# Altium PCB project_buran_a01.PcbDoc
Units mm, origin at the board's own origin, x right, y up, seen from the top; angles counter-clockwise.
Board outline 100 x 50 mm, 2 copper layers (Top Layer, Bottom Layer); 28 components, 33 nets, 138 pads, 184 vias.
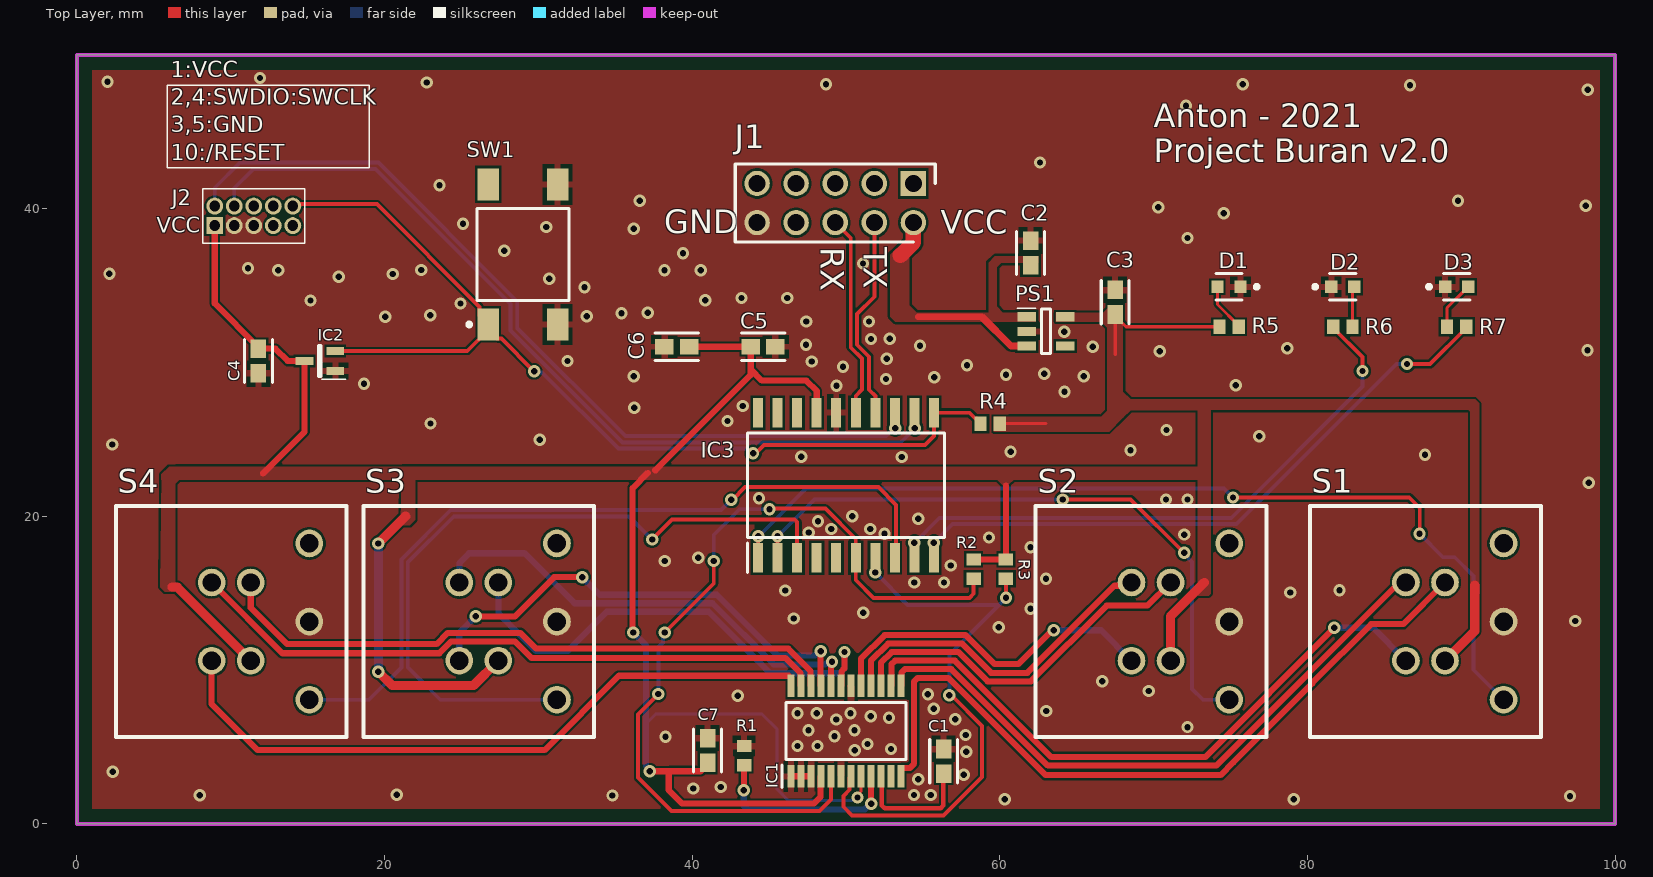
[diagram p0: Top Layer view]
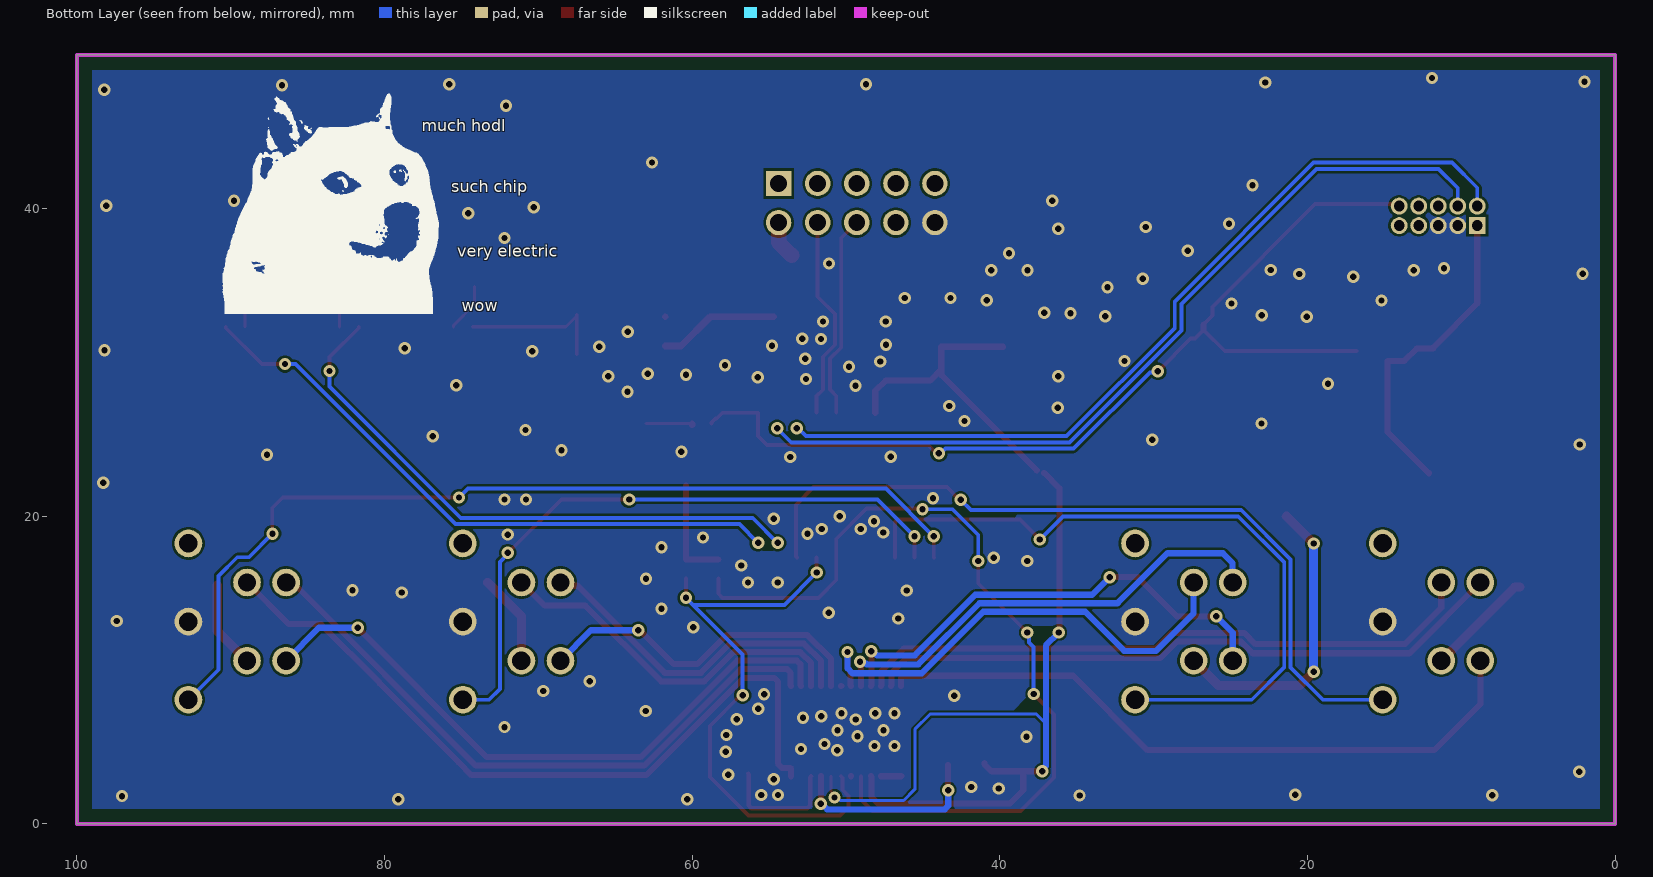
[diagram p1: Bottom Layer view, seen from below]
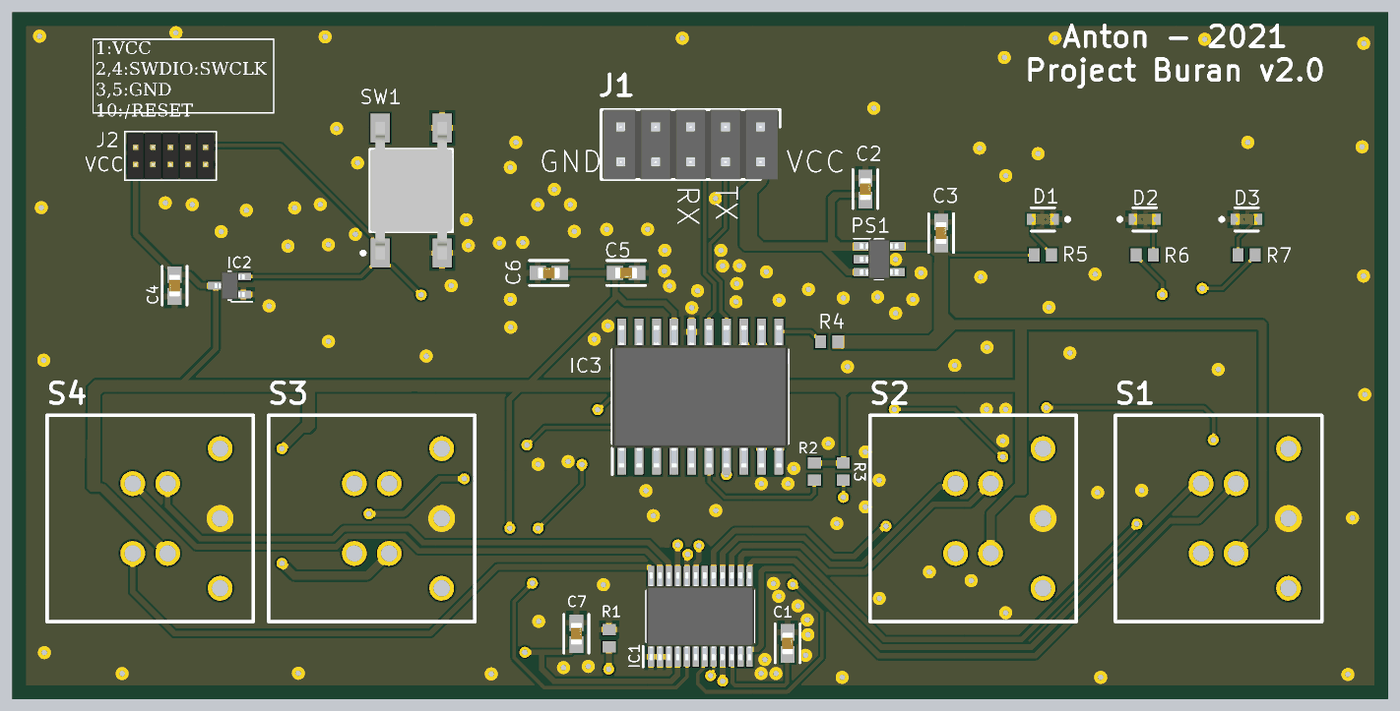
[diagram p2: 3D render of the assembled board from above, using the file's embedded part models]

## Layer stack, top to bottom
Top Solder: solder mask 0.0102, Solder Resist, Dk 3.5
Top Layer: signal copper 0.0356
Dielectric 1: dielectric 0.32, FR-4, Dk 4.8
Bottom Layer: signal copper 0.0356
Bottom Solder: solder mask 0.0102, Solder Resist, Dk 3.5

## Board outline
0,0 100,0 100,50 0,50

## Design rules (kind name [scope] priority, off if disabled: settings)
BoardOutlineClearance [All] p1: gap=0.381 ignorepadtopadclearanceinfootprint=FALSE
Clearance [All] p1: gap=0.152 ignorepadtopadclearanceinfootprint=FALSE except(0: Arc-Hole Track-Hole SMDPad-Hole THPad-Hole Via-Hole Fill-Hole Poly-Hole Region-Hole Text-Hole)
ComponentClearance [All] p1: gap=0.025 collisioncheckmode=3 verticalgap=0.025 showdistances=FALSE
DiffPairsRouting [All] p1: maxlimit=10 minlimit=0.152 mostfreqgap=0.203 toplayer_minwidth=0.152 toplayer_maxwidth=0.381 toplayer_prefwidth=0.203 bottomlayer_minwidth=0.152 bottomlayer_maxwidth=0.381 bottomlayer_prefwidth=0.203 maxuncoupledlength=12.7
HoleSize [All] p1: absolutevalues=TRUE maxlimit=6.731 minlimit=0.33 maxpercent=80.000 minpercent=20.000
HoleToHoleClearance [All] p1: gap=0.254 allowstackedmicrovias=FALSE
MinimumAnnularRing [All] p1: minimumring=0.178
MinimumSolderMaskSliver [All] p1: minsoldermaskwidth=0
PlaneClearance [All] p1: clearance=0.254
PlaneConnect [InNet('GND')] p1: planeconnectstyle=Relief reliefexpansion=0.406 reliefentries=4 reliefconductorwidth=0.152 reliefairgap=0.152
PolygonConnect PolygonConnect_RELIEF [(InComponent('C1') OR InComponent('C2') OR InComponent('C3') OR InComponent('C4') OR InComponent('C5') OR InComponent('C6') OR InComponent('C7') OR InComponent('D1') OR InComponent('D2') OR InComponent('D3') OR InComponent('IC1') OR InComponent('IC2') OR InComponent('IC3') OR InComponent('PS1') OR InComponent('R1') OR InComponent('SW1') OR InComponent('J1')) vs InNet('GND')] p1: thpad.connectstyle=Direct thpad.reliefconductorwidth=0.254 thpad.reliefentries=4 thpad.polygonreliefangle="90 Angle" thpad.airgapwidth=0.254 smdpad.connectstyle=Relief smdpad.reliefconductorwidth=0.42 smdpad.reliefentries=4 smdpad.polygonreliefangle="90 Angle" smdpad.airgapwidth=0.254 via.connectstyle=Direct via.reliefconductorwidth=0.254 via.reliefentries=4 via.polygonreliefangle="90 Angle" via.airgapwidth=0.254
PolygonConnect [All] p2: connectstyle=Direct reliefconductorwidth=0.203 reliefentries=4 polygonreliefangle="90 Angle" airgapwidth=0.152
RoutingCorners [All] p1: cornerstyle=45-Degree minsetback=1.25 maxsetback=1.25
RoutingVias [All] p1: holewidth=0.381 width=0.762 viastyle="Through Hole" minholewidth=0.33 minwidth=0.686 maxholewidth=2.54 maxwidth=2.896
SilkToSilkClearance [All] p1: silktosilkclearance=0
SilkToSolderMaskClearance [IsPad] p1: minsilkscreentomaskgap=0.152 clearancetoexposedcopper=TRUE
SolderMaskExpansion [All] p1: expansion=0.075 istentingtop=FALSE
Width [All] p1: maxlimit=10.16 minlimit=0.152 preferedwidth=0.203
20 further rules are at their usual default settings.

## Components (designator, comment, footprint, x,y, rotation, side; value= is the part's Value field where it differs from the comment)
C1 "1uF" FP-GRM188-0_1-e0_2_0_55-IPC_A 56.35,4.075 r90 top
C2 "1uF" FP-GRM188-0_1-e0_2_0_55-IPC_A 62,37.125 r90 top
C3 "1uF" FP-GRM188-0_1-e0_2_0_55-IPC_A 67.5,33.925 r90 top
C4 "100nF" FP-GRM188-0_1-e0_2_0_55-IPC_A 11.8,30.1 r270 top
C5 "100nF" FP-GRM188-0_1-e0_2_0_55-IPC_A 44.61,31.025 r0 top
C6 "4.7uF" FP-GRM188-0_1-e0_2_0_55-IPC_A 38.998,31.025 r180 top
C7 "1uF" FP-GRM188-0_1-e0_2_0_55-IPC_A 41,4.775 r90 top
D1 "POWER LED" FP-LTST-C190GKT-MFG 74.9,34.925 r180 top
D2 "LED 1" FP-LTST-C190GKT-MFG 82.3,34.925 r0 top
D3 "LED 2" FP-LTST-C190GKT-MFG 89.7,34.925 r0 top
IC1 "LP5012PWR" SOP65P640X120-24N 50,6.041 r90 top
IC2 "MAX803SQ308T1G" SOT65P220X100-3N 15.8,30.1 r180 top
IC3 "ATSAMD11D14A-SSUT" SOIC127P1032X265-20N 50,22.025 r90 top
J1 "2213S-10G" HDRV10W64P254_2X5_1270X508X854P 54.38,41.64 r180 top
J2 "M50-3500542" M503500542 8.96,38.9 r0 top
PS1 "TLV75733PDBVR" SOT95P280X145-5N 63,32.025 r0 top
R1 "2K4" RESC1609X50X30NL10T20 43.375,4.45 r270 top
R2 "4K7" RESC1609X50X30NL10T20 58.297,16.575 r90 top
R3 "4K7" RESC1609X50X30NL10T20 60.397,16.575 r90 top
R4 "10K" RESC1609X50X30NL10T20 59.375,26.025 r0 top
R5 "30R" RESC1609X50X30NL10T20 74.9,32.325 r180 top
R6 "30R" RESC1609X50X30NL10T20 82.3,32.325 r180 top
R7 "30R" RESC1609X50X30NL10T20 89.7,32.325 r0 top
S1 "PB26-13M-B-WT-RGB-N" "RGB Switch" 80.17,5.66 r0 top
S2 "PB26-13M-B-WT-RGB-N" "RGB Switch" 62.33,5.66 r0 top
S3 "PB26-13M-B-WT-RGB-N" "RGB Switch" 18.63,5.66 r0 top
S4 "PB26-13M-B-WT-RGB-N" "RGB Switch" 2.53,5.66 r0 top
SW1 "FSM4JSMA" TECO-FSM4JSMA_V 29,37.025 r180 top

## Footprints (in the part's own frame and the unit in brackets; to place one, negate y for a bottom-side part, rotate by r counter-clockwise, add the part's x,y. Pads: shape width x height; smd on the part's side, far side on the other; paste and mask are expansions set on the pad)
FP-GRM188-0_1-e0_2_0_55-IPC_A [mm]
  rect 1.208x1.012 smd paste+0 mask+0: 1(-0.802,0) 2(0.802,0)
  silkscreen extent -1.41,-0.91 1.41,0.91, body extent -1.91,-1.01 1.91,1.01, height 0.25
FP-LTST-C190GKT-MFG [mm]
  rect 0.8x0.8 smd paste+0 mask+0: 1(-0.75,0) 2(0.75,0)
  silkscreen extent -1.92,-0.85 0.85,0.85, body extent -1.25,-0.55 1.25,0.55, height 0.25
HDRV10W64P254_2X5_1270X508X854P [mm]
  rect 1.65x1.65 hole 1.1: 1(0,0)
  round 1.65 hole 1.1: 2(0,2.54) 3(2.54,0) 4(2.54,2.54) 5(5.08,0) 6(5.08,2.54) 7(7.62,0) 8(7.62,2.54) 9(10.16,0) 10(10.16,2.54)
  silkscreen extent -1.42,-1.27 11.58,3.81, body extent -1.27,-1.27 11.43,3.81, height 8.54
M503500542 [mm]
  rect 1.1x1.1 hole 0.7: 1(0,0)
  round 1.1 hole 0.7: 2(0,1.27) 3(1.27,0) 4(1.27,1.27) 5(2.54,0) 6(2.54,1.27) 7(3.81,0) 8(3.81,1.27) 9(5.08,0) 10(5.08,1.27)
  silkscreen extent -0.78,-1.14 5.86,2.41, body extent -0.63,-1.06 5.72,2.34, height 3.95
RESC1609X50X30NL10T20 [mm] "Chip Resistor, 2-Leads, Body 1.55x0.85mm, IPC Medium Density"
  rect 0.8x0.95 smd: 1(-0.625,0) 2(0.625,0)
  body extent -0.82,-0.48 0.82,0.48, height 0.5
"RGB Switch" [mm]
  round 1.8 hole 1.2: COM(12.58,2.42) L1-(8.77,10.04) L2+(8.77,4.96) L3-(6.23,4.96) L4-(6.23,10.04) NC(12.58,12.58) NO(12.58,7.5)
  silkscreen extent 0,0 15,15
SOIC127P1032X265-20N [mm]
  rect 1.925x0.65 smd: 1(-4.712,5.715) 2(-4.712,4.445) 3(-4.712,3.175) 4(-4.712,1.905) 5(-4.712,0.635) 6(-4.712,-0.635) 7(-4.712,-1.905) 8(-4.712,-3.175) 9(-4.712,-4.445) 10(-4.712,-5.715) 11(4.712,-5.715) 12(4.712,-4.445) 13(4.712,-3.175) 14(4.712,-1.905) 15(4.712,-0.635) 16(4.712,0.635) 17(4.712,1.905) 18(4.712,3.175) 19(4.712,4.445) 20(4.712,5.715)
  silkscreen extent -5.68,-6.4 3.4,6.4, body extent -5.16,-6.4 5.16,6.4, height 2.65
SOP65P640X120-24N [mm]
  rect 1.475x0.45 smd: 1(-2.938,3.575) 2(-2.938,2.925) 3(-2.938,2.275) 4(-2.938,1.625) 5(-2.938,0.975) 6(-2.938,0.325) 7(-2.938,-0.325) 8(-2.938,-0.975) 9(-2.938,-1.625) 10(-2.938,-2.275) 11(-2.938,-2.925) 12(-2.938,-3.575) 13(2.938,-3.575) 14(2.938,-2.925) 15(2.938,-2.275) 16(2.938,-1.625) 17(2.938,-0.975) 18(2.938,-0.325) 19(2.938,0.325) 20(2.938,0.975) 21(2.938,1.625) 22(2.938,2.275) 23(2.938,2.925) 24(2.938,3.575)
  silkscreen extent -3.67,-3.9 1.85,4.15, body extent -3.2,-3.9 3.2,3.9, height 1.2
SOT65P220X100-3N [mm]
  rect 1.15x0.55 smd: 1(-1,0.65) 2(-1,-0.65) 3(1,0)
  silkscreen extent -1.67,-1 0.08,1.17, body extent -1.1,-1 1.1,1, height 1
SOT95P280X145-5N [mm]
  rect 1.2x0.6 smd: 1(-1.25,0.95) 2(-1.25,0) 3(-1.25,-0.95) 4(1.25,-0.95) 5(1.25,0.95)
  silkscreen extent -1.85,-1.45 0.3,1.5, body extent -1.4,-1.45 1.4,1.45, height 1.45
TECO-FSM4JSMA_V [mm] "SMD, 4-Leads, Body 6x6mm, Pitch 4.5mm"
  rect 1.4x2.1 smd: 1(2.25,4.55) 2(2.25,-4.55) 3(-2.25,4.55) 4(-2.25,-4.55)
  silkscreen extent -3,-3 3.62,4.67, body extent -3,-5 3,5, height 5.08

## Part data
C1 C2 C3 C4 C5 C6 C7: library part CMP-2006-02792-2, "Chip Multilayer Ceramic Capacitors for General Purpose, 0603, 10uF, X5R, 15%, 20%, 6.3V", Capacitance=10uF, Case Code (Imperial)=0603, Case Code (Metric)=1608, Dielectric=X5R, Max Operating Temperature=85°C, Min Operating Temperature=-55°C, Package Quantity=4000, Tolerance=20%, Voltage=6.3V, Case/Package=0603, Depth=0.8mm, Height=0.8mm, Lead Free="Lead Free", Length=1.6mm, Material=Ceramic, Mount="Surface Mount", Packaging="Tape and Reel", Radiation Hardening=No, REACH SVHC="No SVHC", Termination=SMD/SMT, Thickness=0.035inch, Voltage Rating=6.3V, Voltage Rating (DC)=6.3V, Width=0.031inch
D1 D2 D3: library part CMP-22017-000005-2, "LED GREEN CLEAR CHIP SMD", Case Code (Imperial)=0603, Case Code (Metric)=1608, Color=Green, Forward Current=30mA, Forward Voltage=2.1V, Lens Color=Colorless, Max Operating Temperature=85°C, Min Operating Temperature=-55°C, Package Quantity=1, Power Dissipation=100mW, Reverse Voltage=5V, Test Current=10mA, Voltage=2V, Case/Package=0603, Depth=0.8mm, Dominant Wavelength=569nm, Height=0.8mm, Illumination Color=Green, Lead Free="Lead Free", Length=1.6mm, Lens Style=Clear, Lens Transparency=Clear, Luminous Intensity=6mcd, Mount="Surface Mount", Number of Elements=1, Number of LEDs=1, Number of Pins=2, Packaging="Tape and Reel", Power Rating=100mW, Radiation Hardening=No, Viewing Angle=130°, Wavelength=565nm, Width=0.8mm
IC1: "Integrated Circuit", Manufacturer_Name="Texas Instruments", Mouser Part Number=595-LP5012PWR, Datasheet Link=https://www.ti.com/lit/ds/symlink/lp5012.pdf?ts=1615929314042&ref_url=https%253A%252F%252Fwww.mouser.co.uk%252F, Height=1.2mm, Manufacturer_Part_Number=LP5012PWR, Mouser Price/Stock=https://www.mouser.co.uk/ProductDetail/Texas-Instruments/LP5012PWR/?qs=T94vaHKWudSL6jLwBy12Hg%3D%3D
IC2: "Integrated Circuit", Manufacturer_Name="ON Semiconductor", Mouser Part Number=863-MAX803SQ308T1G, Arrow Part Number=MAX803SQ308T1G, Arrow Price/Stock=https://www.arrow.com/en/products/max803sq308t1g/on-semiconductor, Datasheet Link=http://www.onsemi.com/pub/Collateral/MAX803-D.PDF, Height=1mm, Manufacturer_Part_Number=MAX803SQ308T1G, Mouser Price/Stock=https://www.mouser.co.uk/ProductDetail/ON-Semiconductor/MAX803SQ308T1G?qs=aSUclzrs14xj4ys5ck7Tew%3D%3D
IC3: "Integrated Circuit", Manufacturer_Name=Microchip, Mouser Part Number=556-ATSAMD11D14ASSUT, Arrow Part Number=ATSAMD11D14A-SSUT, Arrow Price/Stock=https://www.arrow.com/en/products/atsamd11d14a-ssut/microchip-technology, Datasheet Link=http://ww1.microchip.com/downloads/en/devicedoc/atmel-42363-sam-d11_datasheet.pdf, Height=2.65mm, Manufacturer_Part_Number=ATSAMD11D14A-SSUT, Mouser Price/Stock=https://www.mouser.co.uk/ProductDetail/Microchip-Technology-Atmel/ATSAMD11D14A-SSUT/?qs=lrqjml%252Bjt8f8EFewxXrzCw%3D%3D
J1: "Connector", Manufacturer_Name=MULTICOMP, Datasheet Link=http://www.farnell.com/datasheets/1697536.pdf, Height=8.54mm, Manufacturer_Part_Number=2213S-10G
J2: "Connector", Manufacturer_Name=Harwin, Mouser Part Number=855-M50-3500542, Datasheet Link=http://docs-emea.rs-online.com/webdocs/13d4/0900766b813d4011.pdf, Height=4.15mm, Manufacturer_Part_Number=M50-3500542, Mouser Price/Stock=https://www.mouser.co.uk/ProductDetail/Harwin/M50-3500542?qs=9fQaSFfsqsyXI0P9tFOVoQ%3D%3D
PS1: "Power Supply", Manufacturer_Name="Texas Instruments", Mouser Part Number=595-TLV75733PDBVR, Arrow Part Number=TLV75733PDBVR, Arrow Price/Stock=https://www.arrow.com/en/products/tlv75733pdbvr/texas-instruments, Datasheet Link=http://www.ti.com/lit/gpn/tlv757p, Height=1.45mm, Manufacturer_Part_Number=TLV75733PDBVR, Mouser Price/Stock=https://www.mouser.co.uk/ProductDetail/Texas-Instruments/TLV75733PDBVR/?qs=y6ZabgHbY%252BwAAzSntTW34w%3D%3D
R1 R2 R3 R4 R5 R6 R7: library part CMP-2000-03854-1, Manufacturer="Vishay Dale", Part Number=CRCW0603110RFKEA
S1 S2 S3 S4: "WS-PBTL Illuminated THT Push Button Switch, Red & Green & Blue", Emitting Color="Red & Green & Blue", Operating Temperature="-40 to +85degC", Part Number=465M111172501, Rated Current=100mA, Rated Voltage=12VDC, ComponentLink1Description=Manufacturer, ComponentLink1URL=http://www.we-online.de, ComponentLink2Description=Datasheet, ComponentLink2URL=https://katalog.we-online.com/em/datasheet/465M111172501.pdf, Contact Material="Copper Alloy", Contact Plating=Gold, Mounting Technology=THT, Operation Force=200gf, Packaging="ESD Tray", Published Date="September 2019", Publisher="Wurth Elektronik", Size=15x15mm, Terminal Material="Copper Alloy", Terminal Plating=Tin
SW1: library part CMP-2000-05602-2, "Swicth, SPST, 24 V, -35 to 85 degC, 4-Pin SMD, RoHS, Tape and Reel", Case\/Package=SMD/SMT, Contact Current Rating=50mA, Contact Resistance=100mOhm, Manufacturer="TE Connectivity", Max Operating Temperature=85degC, Max Voltage Rating (DC)=12V, Min Operating Temperature=-35degC, Operating Force=1.57N, Package Description="4-Pin Surface Mount Device, Body 6 x 6 mm, Pitch 4.5 mm", Package Quantity=750, Voltage Rating=24V, Actuator Length=0.055inch, Actuator Material=Polyamide, Contact Material=CopperAlloy, Contact Plating=Silver, Current Rating=50mA, Datasheet URL=http://www.te.com/commerce/DocumentDelivery/DDEController?Action=showdoc&DocId=Customer+Drawing%7F2-1437565-7%7FV%7Fpdf%7FEnglish%7FENG_CD_2-1437565-7_V.pdf%7F4-1437565-2, Datasheet Version="Rev. V, 02/2015", Electrical Life=100000Cycles, Illumination Type=Illuminated, Length=6mm, Manufacturer URL=http://www.te.com/, Mechanical Life=100000Cycles, Mount=SurfaceMount, Mounting Technology=SurfaceMount, Orientation=Straight, Package Reference=FSM4JSMA, Packaging=LoosePiece, REACH SVHC=Unknown, RoHSCompliant=true, Switch Travel=0.25mm, Termination=GullWing, Throw Configuration=SPST, Voltage Rating (DC)=24V, Width=6mm

## Via types
v1: diameter 0.8, hole 0.411, Top Layer to Bottom Layer, 184 vias

## Nets (pads, with @x,y where several pads share a name; then routed paths per layer and width w, separated by ;. In a path a pad name is that pad's centre, name@x,y a point inside that pad or via, vN(x,y) a via of type N, cw(c..) or ccw(c..) an arc to the next point about the centre after c; other vN are vias at no path point)
/RESET: IC2.2 IC3.11 J2.10 R4.1 SW1.1 | length 64.7
  Top Layer w0.254: J2.10 14.17,40.3 19.5,40.3 26.177,33.623 26.177,33.048 SW1.1 ; IC2.2 25.375,30.75 SW1.1@26.75,32.125 ; SW1.1@26.888,31.988 27.323,31.552 27.598,31.552 v1(29.725,29.425) ; v1(43.96,24.096) 44.108,24.096 44.657,24.645 55.145,24.645 55.715,25.215 IC3.11 58.038,26.737 58.402,26.373 58.477,26.373 58.75,26.1 R4.1
  Top Layer w0.4: SW1.1@26.75,32.125 SW1.1
  Bottom Layer w0.254: v1(29.725,29.425) 29.798,29.352 30.248,29.352 35.2,24.4 43.538,24.4 43.843,24.096 v1(43.96,24.096)
GND: C1.2 C2.2 C3.2 C4.2 C5.2 C6.2 C7.2 D1.1 D2.1 D3.1 IC1.1 IC1.2 IC1.3 IC1.6 IC1.18 IC2.1 IC3.16 J1.10 J2.3 J2.5 PS1.2 R1.1 S1.NO S2.NO S3.NO S4.NO SW1.3 SW1.4 | length 1.5
  Top Layer w0.203: D2.1@81.488,34.987 D2.1
  Top Layer w0.4: IC1.1@46.4,3.128 IC1.1 IC1.2 ; IC1.2@47.062,3.115 IC1.2 ; IC1.3 IC1.2 ; IC1.18@50.313,8.967 IC1.18
  other v1: 60.314,1.6 79.1,1.6 97.065,1.814 34.814,1.85 7.989,1.875 54.425,1.886 55.5,1.881 20.8,1.9 40.062,2.311 41.863,2.401 54.7,2.9 57.65,3.206 2.339,3.4 57.825,4.706 50.562,4.799 52.925,4.877 46.85,5.075 48.15,5.075 51.4,5.2 38.262,5.676 49.25,5.7 57.775,5.781 47.562,6.099 50.55,6.1 72.2,6.3 49.362,6.799 57.1,6.8 52.8,6.9 51.6,7 46.85,7.2 48.1,7.2 50.289,7.199 63.014,7.35 55.7,7.5 42.962,8.34 55.325,8.431 69.691,8.641 66.65,9.275 59.922,12.8 97.4,13.2 46.595,13.365 51.13,13.739 62,14 78.88,15.05 46.05,15.181 82.08,15.2 54.442,15.694 56.372,15.694 63,15.95 56.8,16.8 38.217,17.1 40.4,17.3 62,18 59.3,18.625 71.991,18.814 52.5,18.875 47.575,18.95 49.04,19.175 51.58,19.175 48.178,19.684 54.698,19.845 50.4,20 70.8,21.1 72.2,21.1 44.347,21.174 98.289,22.175 53.629,23.859 47.088,23.865 87.639,24 60.7,24.2 68.5,24.3 2.289,24.675 30.089,24.975 76.864,25.2 70.84,25.617 22.985,26.04 42.3,26.2 36.233,27.069 43.289,27.175 64.2,28.1 49.387,28.49 75.339,28.525 18.664,28.625 52.6,28.925 55.728,29.043 36.2,29.1 65.447,29.1 60.4,29.2 62.889,29.275 49.8,29.725 57.864,29.825 47.77,30.07 31.9,30.1 52.65,30.25 70.389,30.725 98.2,30.8 78.693,30.935 66.039,31.025 54.809,31.1 47.401,31.157 51.625,31.531 52.839,31.55 64.195,32.006 47.425,32.667 51.5,32.667 20.038,32.978 33.148,33.015 22.975,33.075 35.4,33.2 37.105,33.242 24.937,33.836 15.185,34.028 40.85,34.05 43.204,34.19 46.177,34.2 33,34.9 30.7,35.45 17.02,35.582 2.114,35.775 20.527,35.76 13.083,35.996 38.196,36 40.564,36 22.391,36.011 11.125,36.125 51.105,36.442 39.4,37.1 27.775,37.275 72.2,38.1 36.2,38.7 30.516,38.808 25.1,39.03 74.55,39.7 70.3,40.1 98.1,40.2 36.6,40.525 89.789,40.525 23.575,41.531 62.616,43.009 72.1,46.7 98.214,47.725 86.664,48.025 48.7,48.1 75.789,48.1 22.739,48.2 1.989,48.25 11.9,48.5
LED_OUT_1: IC3.9 R6.2 | length 38
  Top Layer w0.254: R6.2 81.675,32.25 83.575,30.35 v1(83.575,29.45)
  Bottom Layer w0.254: v1(54.442,18.278) 56.064,19.9 75.046,19.9 83.575,28.429 v1(83.575,29.45)
LED_OUT_2: IC3.10 R7.2 | length 40.5
  Top Layer w0.254: v1(86.475,29.9) 87.975,29.9 90.325,32.25 R7.2
  Bottom Layer w0.254: v1(55.712,18.278) 56.928,19.494 75.394,19.494 85.8,29.9 v1(86.475,29.9)
NetC1_1: C1.1 IC1.10 | length 8.1
  Top Layer w0.3: IC1.10 52.335,3.043 52.335,1.201 52.511,1.025 56.148,1.025 56.323,1.201 56.323,3.247 C1.1
NetD1_2: D1.2 R5.1 | length 3.2
  Top Layer w0.203: D1.2 74.15,33.775 75.525,32.4 R5.1
NetD2_2: D2.2 R6.1 | length 2.7
  Top Layer w0.203: R6.1 82.925,34.8 D2.2
NetD3_2: D3.2 R7.1 | length 3.2
  Top Layer w0.203: R7.1 89.075,33.55 D3.2
NetIC1_9: IC1.9 R1.2 | length 13
  Top Layer w0.4: v1(43.35,2.2) 43.363,2.213 43.363,3.813 R1.2 ; IC1.9 51.629,3.099 51.629,1.329 v1(51.632,1.325)
  Bottom Layer w0.4: v1(43.35,2.2) 43.35,1.184 43.584,0.95 51.216,0.95 51.591,1.325 v1(51.632,1.325)
OUT0: IC1.12 S1.L1- | length 49.3
  Top Layer w0.4: IC1.12 53.575,3.615 53.6,3.64 54.14,3.64 54.425,3.925 54.425,9.266 54.659,9.5 56.65,9.5 62.975,3.175 74.35,3.175 75.175,4 80.325,9.15 80.325,9.175 84.15,13 86.24,13 S1.L1-
OUT1: IC1.13 S1.L4- | length 41.3
  Top Layer w0.4: IC1.13 53.6,9.004 53.6,9.841 53.834,10.075 56.856,10.075 63.129,3.802 74.077,3.802 85.975,15.7 S1.L4-
OUT2: IC1.14 S1.L3- | length 41.9
  Top Layer w0.4: IC1.14 52.95,9.004 52.95,10.381 53.197,10.627 57.085,10.627 63.358,4.355 73.355,4.355 v1@81.756,12.756
  Bottom Layer w0.4: v1(81.736,12.756) 84.264,12.756 S1.L3-
OUT3: IC1.15 S2.L1- | length 24.1
  Top Layer w0.4: IC1.15 52.275,10.487 52.968,11.18 57.314,11.18 59.219,9.275 62.02,9.275 66.945,14.2 69.6,14.2 S2.L1-
OUT4: IC1.16 S2.L4- | length 22.3
  Top Layer w0.4: IC1.16 51.625,10.618 52.739,11.732 57.543,11.732 59.447,9.827 61.791,9.827 67.451,15.487 68.347,15.487 S2.L4-
OUT5: IC1.17 S2.L3- | length 22.5
  Top Layer w0.4: IC1.17 50.975,10.749 52.51,12.285 57.771,12.285 59.656,10.4 61.2,10.4 63.4,12.6 v1(63.5,12.6)
  Bottom Layer w0.4: v1(63.5,12.6) 66.58,12.6 S2.L3-
OUT6: IC1.19 S3.L1- | length 31.7
  Top Layer w0.4: IC1.19 49.7,9.004 49.7,9.913 49.9,10.113 v1(49.9,11.18)
  Bottom Layer w0.4: S3.L1- 27.4,13.7 29.844,11.256 31.906,11.256 34.445,13.795 41.08,13.795 45.075,9.8 49.587,9.8 49.9,10.113 v1(49.9,11.18)
OUT7: IC1.20 S3.L4- | length 30.4
  Top Layer w0.4: IC1.20 49.025,10.484 v1(49.094,10.552)
  Bottom Layer w0.4: S3.L4- 24.866,15.706 24.866,16.966 25.5,17.6 29.1,17.6 32.3,14.4 32.352,14.348 41.321,14.348 45.295,10.374 48.66,10.374 48.761,10.476 49.017,10.476 v1(49.094,10.552)
OUT8: IC1.21 S3.L3- | length 31.3
  Top Layer w0.4: v1(25.93,13.5) 28.488,13.5 31.038,16.05 v1(32.85,16.05) ; v1(48.366,11.238) 48.341,11.213 48.341,9.827 48.35,9.818 48.35,9.004 IC1.21
  Bottom Layer w0.4: S3.L3- 24.86,12.43 v1(25.93,13.5) ; v1(32.85,16.05) 34,14.9 41.6,14.9 45.535,10.965 47.985,10.965 48.258,11.238 v1(48.366,11.238)
OUT9: IC1.22 S4.L1- | length 41.3
  Top Layer w0.4: S4.L1- 11.3,14.06 13.66,11.7 23.388,11.7 24.112,12.425 28.826,12.425 29.851,11.4 46.246,11.4 47.7,9.946 47.7,9.004 IC1.22
OUT10: IC1.23 S4.L4- | length 42.2
  Top Layer w0.4: S4.L4- 13.36,11.1 23.569,11.1 24.341,11.872 28.474,11.872 29.546,10.8 46.065,10.8 47.05,9.815 47.05,9.004 IC1.23
OUT11: IC1.24 S4.L3- | length 44.3
  Top Layer w0.4: S4.L3- 8.76,7.8 11.76,4.8 30.4,4.8 35.235,9.635 46.281,9.635 46.425,9.491 IC1.24
RX_MCU: IC3.15 J1.6 | length 13.3
  Top Layer w0.254: J1.6 50.31,38.09 50.31,30.99 51.043,30.257 51.043,28.234 50.635,27.827 IC3.15
SCL: IC1.7 IC3.7 R3.1 | length 38
  Top Layer w0.254: IC1.7 50.227,3.005 50.227,2.227 49.825,1.825 49.825,1.124 50.399,0.55 56.35,0.55 58.85,3.05 58.85,6.375 56.857,8.368 v1(56.718,8.368) ; v1(51.905,16.351) IC3.7 IC3.7@51.907,17.311 ; v1(60.397,14.7) R3.1
  Bottom Layer w0.254: v1(51.905,16.351) 54.006,14.25 59.947,14.25 ; v1@56.65,8.436 v1(56.718,8.368) 56.718,11.021 59.947,14.25 ; v1@60.249,14.7 v1(60.397,14.7) 59.947,14.25
SDA: IC1.5 IC3.6 R2.1 | length 55.7
  Top Layer w0.254: v1(37.8,8.45) 36.475,7.125 36.475,3.011 38.643,0.843 48.268,0.843 49.025,1.6 IC1.5 ; v1(38.217,12.452) 41.4,15.635 v1(41.4,17.1) ; v1(45.029,20.462) 45.065,20.498 48.678,20.498 50.635,18.541 IC3.6 50.635,15.865 51.8,14.7 58.028,14.7 58.297,14.969 R2.1
  Bottom Layer w0.254: v1(37.8,8.45) 37.8,11.497 38.113,11.809 38.113,12.348 v1(38.217,12.452) ; v1(41.4,17.1) 41.4,18.785 43.077,20.462 v1(45.029,20.462)
SW0: IC3.1 S1.COM | length 61.4
  Top Layer w0.254: IC3.1 44.293,17.321 44.293,18.693 v1(44.3,18.7) ; v1(75.158,21.225) 86.615,21.225 87.3,20.54 v1@87.3,18.876
  Bottom Layer w0.254: v1(44.3,18.7) 47.4,21.8 74.583,21.8 v1(75.158,21.225) ; v1(87.28,18.876) 88.816,17.34 89.576,17.34 90.8,16.116 90.8,10.03 S1.COM
SW1: IC3.2 S2.COM | length 42.1
  Top Layer w0.254: v1(45.55,18.7) 45.553,18.697 45.553,17.316 IC3.2 ; v1(64.1,21.1) 68.504,21.1 v1@72,17.604
  Bottom Layer w0.254: v1(45.55,18.7) 47.95,21.1 v1(64.1,21.1) ; v1(71.991,17.638) 71.991,17.552 72.5,17.043 72.5,8.78 73.2,8.08 S2.COM
SW2: IC3.3 S3.COM | length 47.5
  Top Layer w0.254: v1(37.4,18.5) 38.683,19.783 46.668,19.783 46.825,19.626 IC3.3
  Bottom Layer w0.254: S3.COM 23.62,8.08 21.506,10.194 21.506,17.006 24.5,20 35.9,20 v1(37.4,18.5)
SW3: IC3.8 S4.COM | length 51.9
  Top Layer w0.254: v1(42.549,21.075) 42.617,21.075 43.442,21.9 52.1,21.9 53.25,20.75 53.25,17.388 IC3.8
  Bottom Layer w0.254: S4.COM 18.98,8.08 ; 19,8.08 21.1,10.18 21.1,17.2 24.306,20.406 41.88,20.406 v1(42.549,21.075)
SWCLK: IC3.12 J2.4 | length 54.7
  Bottom Layer w0.254: J2.4 10.23,41.335 11.47,42.575 19.425,42.575 28.2,33.8 28.2,32.075 35.469,24.806 53.556,24.806 v1(54.475,25.725)
SWDIO: IC3.13 J2.2 | length 54.7
  Bottom Layer w0.254: J2.2 8.96,41.36 10.6,43 19.601,43 28.625,33.976 28.625,32.251 35.663,25.213 52.608,25.213 53.12,25.725 v1(53.2,25.725)
TX_MCU: IC3.14 J1.4 | length 13.3
  Top Layer w0.254: J1.4 51.84,34.278 50.716,33.154 50.716,31.158 51.5,30.375 51.5,28.231 51.905,27.827 IC3.14
V_UNREG: C2.1 J1.2 PS1.1 PS1.3 | length 10.3
  Top Layer w0.45: 54.715,32.975 58.825,32.975 60.725,31.075 PS1.3
  Top Layer w1: 53.536,36.966 54.38,37.81 J1.2
VCC: C3.1 C4.1 C5.1 C6.1 C7.1 IC1.4 IC1.8 IC2.3 IC3.17 J2.1 PS1.5 R2.2 R3.2 R4.2 R5.2 S1.L2+ S2.L2+ S3.L2+ S4.L2+ | length 157.8
  Top Layer w0.203: v1(50.75,1.725) 50.75,1.886 50.975,2.111 IC1.8 ; R4.2 63,26.025 ; 67.5,30.525 C3.1@67.5,33.025 ; C3.1 C3.1@67.5,33.025 ; R5.2 68.2,32.325 C3.1@67.5,33.025
  Top Layer w0.4: J2.1@8.96,39.199 J2.1 8.96,33.84 11.8,31 C4.1 12.899,30.902 13.7,30.1 IC2.3 14.8,25.5 12.1,22.8 ; 21.36,20 21.5,20 ; v1(36.164,12.452) 36.125,12.491 36.125,21.825 37.121,22.821 ; v1(37.25,3.425) 38.475,3.425 ; 37.6,23 37.608,23 43.808,29.2 43.808,29.552 ; C6.1 C5.1 43.808,29.552 ; C7.1 41,3.875 40.55,3.425 38.475,3.425 ; IC3.17 48.095,28.155 47.425,28.825 44.535,28.825 43.808,29.552 ; IC1.4 48.35,3.078 48.35,1.775 47.9,1.325 39.35,1.325 38.475,2.2 38.475,3.425 ; R2.2 R3.2 60.397,22 ; R4.2@60,25.95 R4.2
  Top Layer w0.6: 6.2,15.4 6.52,15.4 S4.L2+ ; v1(19.6,9.9) 20.5,9 25.78,9 S3.L2+ ; v1(19.6,18.24) 21.36,20 ; S2.L2+ 71.1,13.5 73.3,15.7 ; S1.L2+ 90.868,12.548 90.868,15.528
  Bottom Layer w0.203: 37,6.525 37.625,7.15 44.525,7.15 45.525,6.15 45.525,2.25 46.25,1.525 50.389,1.525 50.589,1.725 v1(50.75,1.725)
  Bottom Layer w0.4: v1(36.164,12.452) 36.164,12.448 37,11.611 37,6.525 37,3.783 37.25,3.533 v1(37.25,3.425)
  Bottom Layer w0.6: v1(19.6,9.9) v1(19.6,18.24)
pads on no net: IC1.11 IC3.4 IC3.5 IC3.18 IC3.19 IC3.20 J1.1 J1.3 J1.5 J1.7 J1.8 J1.9 J2.6 J2.7 J2.8 J2.9 PS1.4 S1.NC S2.NC S3.NC S4.NC SW1.2

## Polygon pours and split planes (outlines as drawn)
GND on Top Layer "GND_L01_P015" (solid, pour order 15): 1,49 99,49 99,1 1,1
VCC on Top Layer "VCC_L01_P009" (solid, pour order 9): 72.876,14.852 73.595,14.852 73.724,14.981 73.724,27.6 72.876,27.6
VCC on Top Layer "VCC_L01_P017" (solid, pour order 17): 21.108,23.237 21.599,23.237 22,23.237 22,19.766 21.65,19.416 21.057,19.416
VCC on Top Layer "VCC_L01_P016" (solid, pour order 16): 5.502,22.739 5.999,23.237 6.4,23.237 6.4,15.617 6.516,15.501 6.4,15.101 5.717,15.101 5.428,15.39
VCC on Top Layer "VCC_L01_P011" (solid, pour order 11): 73.721,22.1 73.721,23.473 73.382,23.633 72.985,23.236 10.6,23.236 5.998,23.236 5.5,22.738 5.5,22.387 6.389,22.127 6.649,22.387 6.892,22.387 10.9,22.388 11.7,22.388 27.8,22.388 28.7,22.388 29.4,22.389 29.8,22.388 59.838,22.388 60.198,22.027 60.594,22.084 60.898,22.388 72.9,22.388 73.382,21.906
V_UNREG on Top Layer "V_UNREG_L01_P000" (solid, pour order 0): 52.865,37.004 53.187,37.327 53.892,37.327 54.123,37.567 54.123,32.652 53.209,32.652 52.876,32.986
V_UNREG on Top Layer "V_UNREG_L01_P001" (solid, pour order 1): 52.876,32.986 52.876,33.25 52.876,34.974 54.6,33.25 59.276,33.25 59.8,33.647 60.197,33.25 62.349,33.25 62.349,32.649 53.209,32.652
VCC on Top Layer "VCC_L01_P007" (solid, pour order 7): 68,26.4 67.106,25.506 59.619,25.506 59.6,25.525 59.6,26.475 66.591,26.475 67.373,27.256 67.975,26.475 68.022,26.422
VCC on Top Layer "VCC_L01_P008" (solid, pour order 8): 66.982,26.866 67.016,26.9 68.003,26.403 68.5,26.9 72.925,26.9 73.325,26.5 72.925,26.9 74.625,26.9 90.488,26.9 91.16,26.228 91.16,27.34 90.9,27.6 68.5,27.6 68.003,28.097 66.988,27.6
V_UNREG on Top Layer "V_UNREG_L01_P003" (solid, pour order 3): 59.276,32.677 59.8,32.674 59.8,36.9 59.678,36.9 59.276,36.499
VCC on Top Layer "VCC_L01_P005" (solid, pour order 5): 63.65,32.65 66.6,32.65 66.989,32.261 68.006,32.653 68.006,33.2 68.006,33.25 67.003,33.528 66.725,33.25 63.65,33.25
VCC on Top Layer "VCC_L01_P006" (solid, pour order 6): 66.994,32.74 68.006,32.74 68.006,26.428 67.084,25.506 66.982,25.506
V_UNREG on Top Layer "V_UNREG_L01_P004" (solid, pour order 4): 62.5,36.9 62.5,36.499 60.1,36.499 59.799,36.197 59.276,36.499 59.678,36.9
VCC on Top Layer "VCC_L01_P010" (solid, pour order 10): 90.576,15 91.161,15 91.161,27.339 90.9,27.6 90.576,27.6
GND on Bottom Layer "GND_L02_P014" (solid, pour order 14): 1,49 99,49 99,1 1,1

## Keep-outs
Keep-Out Layer:
  the board outline again, w0.254

## Other copper
Top Layer:
  pour cut-out: 54.879,16.198 55.346,16.2 55.346,17.954 55.26,18.04 55.26,18.477 55.214,18.753 54.899,18.753 54.861,18.082 54.82,18.04 54.82,16.198
  pour cut-out: 51.014,25.62 51.563,25.62 51.563,27.892 51.417,28.038 51.084,28.038 51.019,27.974 51.019,27.455
  pour cut-out: 47.833,10.196 47.993,10.196 48.077,10.289 48.077,10.916 47.854,11.139 47.684,11.018 47.407,11.049 47.042,11.068 46.928,11.049 47.238,10.739 47.286,10.691 47.537,10.485
  pour cut-out: 50.027,9.77 50.66,9.77 50.66,10.777 50.807,11.023 50.211,11.654 50.099,11.654 50.301,11.529 50.409,11.344 50.409,11.039 50.338,10.902 50.285,10.82 50.245,10.757 50.195,10.269 50.121,10.195 50.121,9.864
  pour cut-out: 45.593,19.991 45.635,19.949 46.888,19.949 47.144,20.205 47.043,20.306 45.624,20.306 45.577,20.259
  pour cut-out: 44.566,16.203 45.359,16.203 45.362,16.206 45.168,16.4 45.168,18.389 45.098,18.459 45.098,18.886 45.435,19.223 45.742,19.223 45.742,19.527 45.69,19.579 44.052,19.579 44.052,19.173 44.096,19.129 44.118,19.15 44.492,19.15 44.767,18.875 44.767,18.275 44.677,18.185 44.677,17.992
  pour cut-out: 45.992,16.198 46.437,16.198 46.378,16.257 46.378,18.256 46.623,18.5 46.601,18.522 46.601,19.505 46.497,19.609 45.868,19.609 45.698,19.44 45.709,19.429 45.709,19.142 45.716,19.142 46.024,18.834 46.01,18.821 46.01,18.489 45.865,18.343 45.941,18.267 45.941,18.143
  pour cut-out: 89.499,32.952 89.896,32.952 89.896,32.189 89.759,32.052 89.561,32.052 89.561,32.608 89.533,32.636 89.542,32.644 89.542,32.86 89.406,32.86 89.401,32.865
  pour cut-out: 82.049,32.951 82.497,32.951 82.497,32.134 82.404,32.041 82.116,32.041 82.116,32.567 82.122,32.573 82.109,32.587 82.109,32.828 82.03,32.828 82.007,32.851
  pour cut-out: 74.672,31.697 75.181,31.697 75.182,31.698 75.096,31.784 75.096,32.537 75.041,32.593 74.961,32.513 74.746,32.513 74.746,31.906 74.648,31.808
Bottom Layer:
  pour cut-out: 45.714,19.19 45.703,19.201 45.286,19.201 45.286,19.404 47.47,21.588 63.496,21.588 63.496,21.318 63.508,21.306 47.895,21.306 45.789,19.2 45.7,19.2
  pour cut-out: 37.302,7.239 37.46,7.239 37.554,7.332 37.584,7.302 39.126,7.302 39.126,7.379 38.342,8.163 38.129,8.163 37.946,7.98 37.643,7.98 37.528,8.095 37.494,8.061 37.243,8.061
  pour cut-out: 54.718,17.75 55.425,17.75 55.425,17.875 55.25,18.05 55.25,18.55 54.991,18.55 54.91,18.47 54.91,18.095 54.688,17.873 54.647,17.873
  pour cut-out: 37.275,8.975 37.25,9 37.25,11.775 36.575,12.45 36.575,12.9 38.3,12.9 38.25,12.85 38.25,12.5 38.15,12.4 38.15,12.151 37.598,11.599 37.598,8.964 37.595,8.961
  pour cut-out: 38.682,20.318 38.682,20.302 39.062,19.921 39.074,19.933 42.141,19.933 42.55,20.342 42.406,20.487 40.654,20.487 40.453,20.286 40.081,20.286 39.828,20.539 38.665,20.539

## Silkscreen, mask and mechanical layers (free items; w line width, h text height)
Top Overlay:
  lines w0.1: 5.873,42.673 19,42.673 19,48.027 5.873,48.027 5.873,42.673
  text "Anton - 2021 / Project Buran v2.0" at 70,43.025 h1.52
  text "1:VCC / 2,4:SWDIO:SWCLK / 3,5:GND / 10:/RESET" at 6.1,42.8 h1.8
  text "VCC" at 5.2,38.45 h1
  text "GND" at 38.2,38.4 h1.52
  text "VCC" at 56.15,38.375 h1.52
  text "RX" at 48.367,37.48 h1.52 r270
  text "TX" at 51.148,37.48 h1.52 r270
Bottom Overlay:
  drawing of 16 lines, arcs and shapes, not listed
  text "much hodl" at 77.573,45.027 h0.76
  text "such chip" at 75.673,41.081 h0.76
  text "very electric" at 75.273,36.881 h0.76
  text "wow" at 74.973,33.327 h0.76